# Altium PCB ESC_Mounting.PcbDoc
Units mil, origin at the board's own origin, x right, y up, seen from the top; angles counter-clockwise.
Board outline 1250 x 2900 mil, 2 copper layers (Top Layer, Bottom Layer); 4 components, 6 nets, 18 pads, 0 vias.
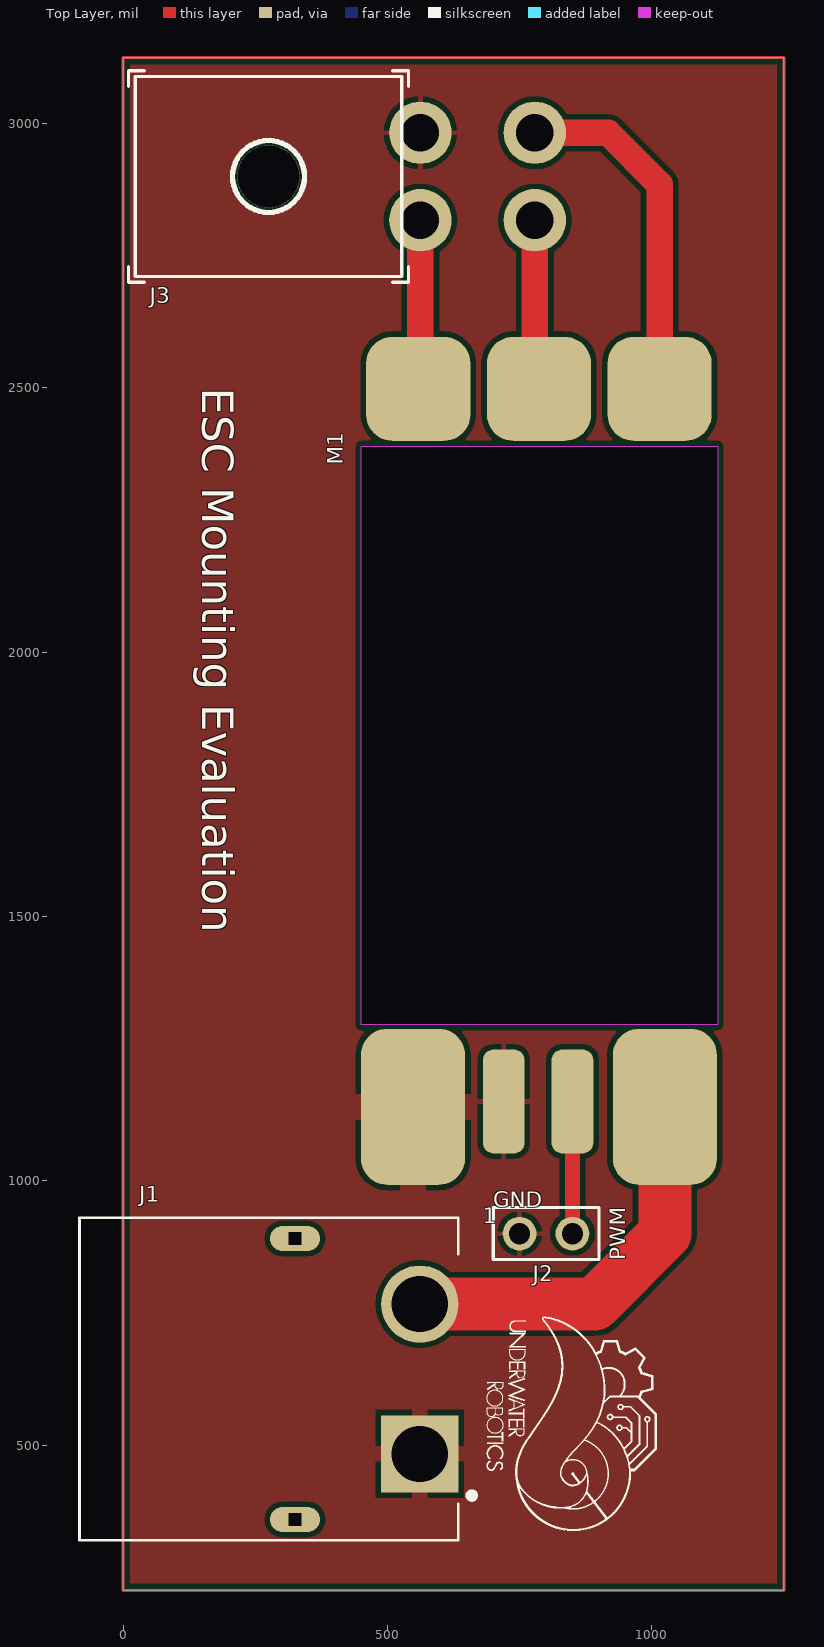
[diagram p0: Top Layer view]
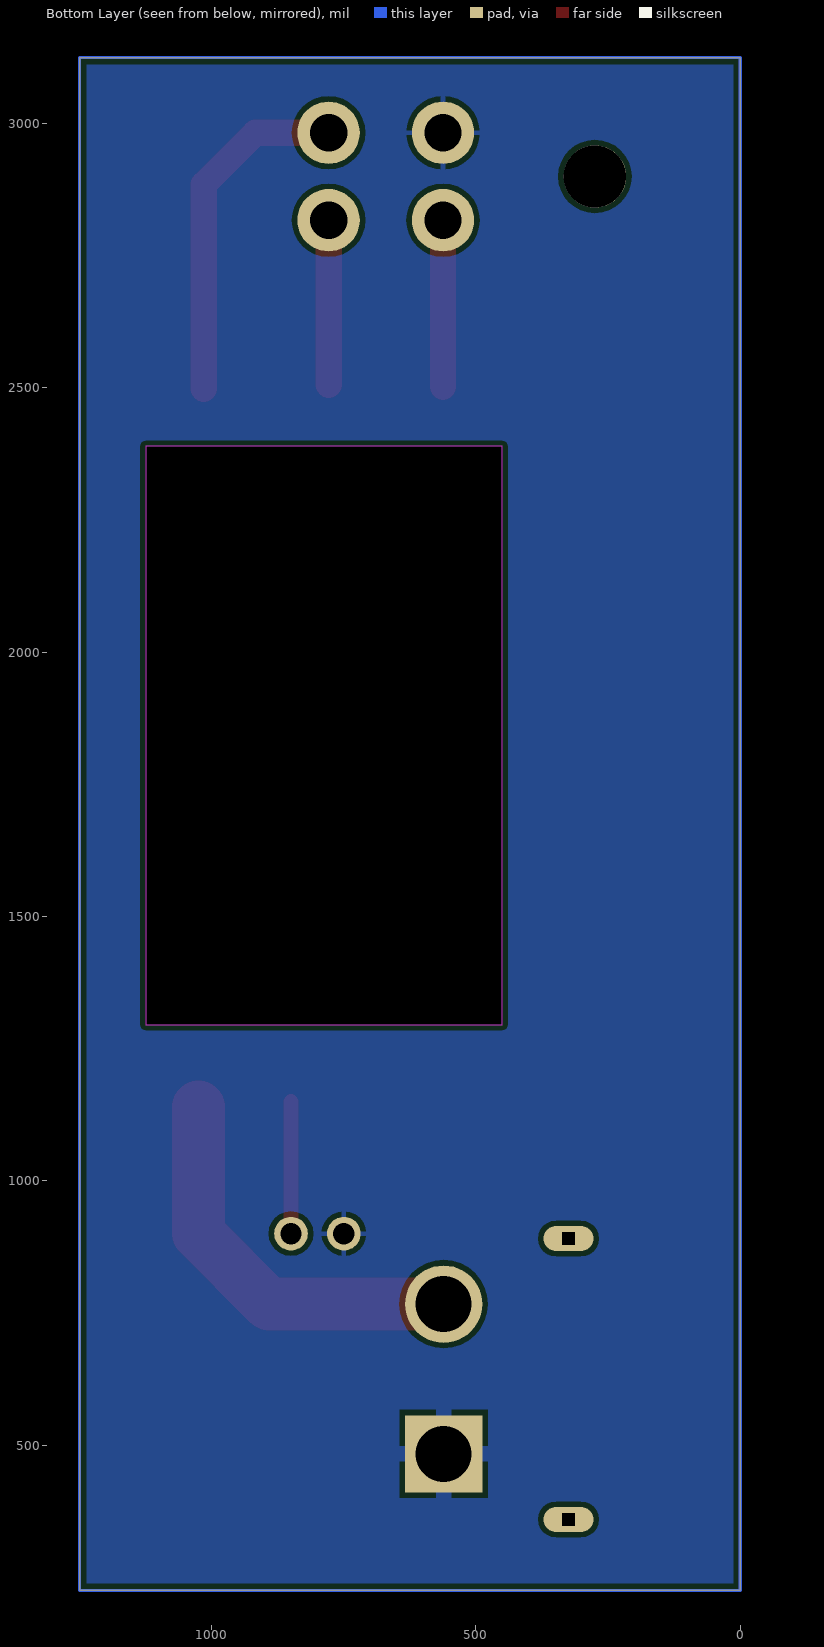
[diagram p1: Bottom Layer view, seen from below]
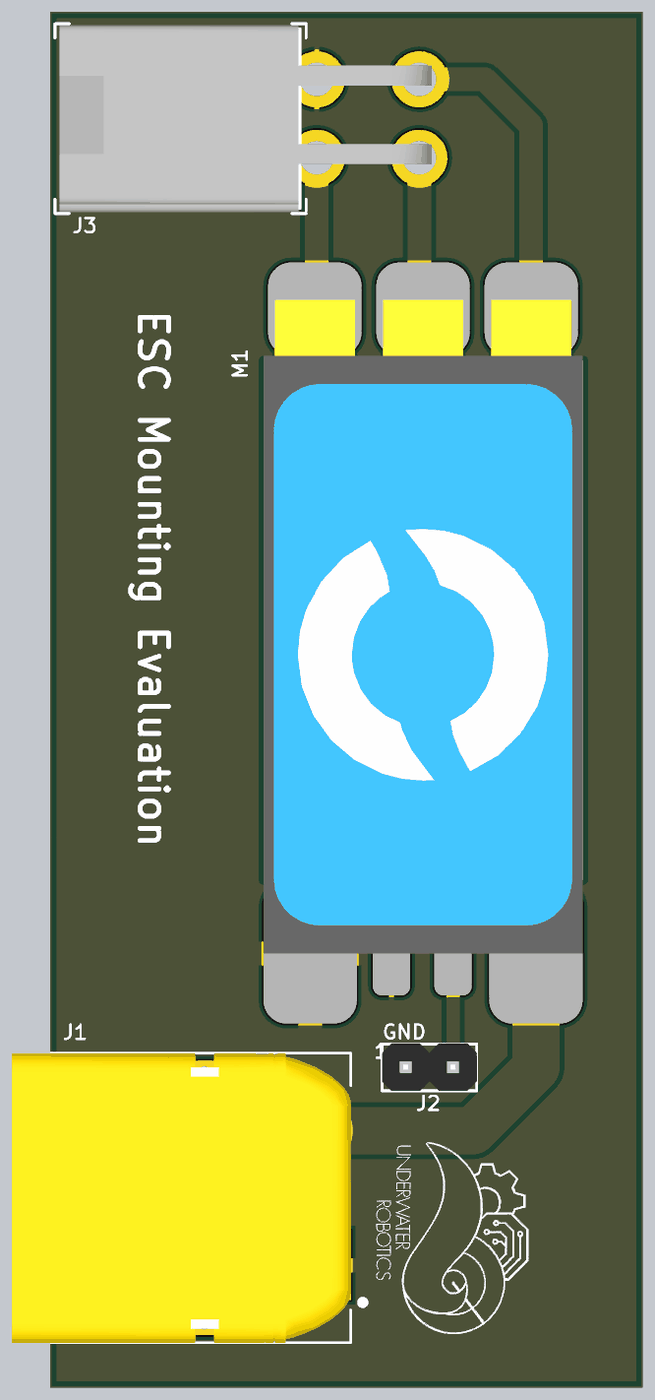
[diagram p2: 3D render of the assembled board from above, using the file's embedded part models]

## Layer stack, top to bottom
Top Solder: solder mask 0.4, Solder Resist, Dk 3.5
Top Layer: signal copper 1.4
Dielectric 1: dielectric 12.6, FR-4, Dk 4.8
Bottom Layer: signal copper 1.4
Bottom Solder: solder mask 0.4, Solder Resist, Dk 3.5

## Board outline
0,225 0,3125 1250,3125 1250,225

## Design rules (kind name [scope] priority, off if disabled: settings)
Clearance [All] p1: gap=10 ignorepadtopadclearanceinfootprint=FALSE except(0: Arc-Hole Track-Hole SMDPad-Hole THPad-Hole Via-Hole Fill-Hole Poly-Hole Region-Hole Text-Hole)
PolygonConnect [All] p1: connectstyle=Relief reliefconductorwidth=10 reliefentries=4 polygonreliefangle="90 Angle" airgapwidth=10
RoutingVias [All] p1: holewidth=28 width=50 viastyle="Through Hole" minholewidth=28 minwidth=50 maxholewidth=28 maxwidth=50
SolderMaskExpansion [All] p1: expansion=4 istentingtop=FALSE
Width [All] p1: maxlimit=10 minlimit=10 preferedwidth=10
30 further rules are at their usual default settings.

## Components (designator, comment, footprint, x,y, rotation, side; value= is the part's Value field where it differs from the comment)
J1 "XT60PW-M" XT60_PW_AMASS_M 325,625 r90 top
J2 "2 POS" HEADER_2PIN_2.54MM 750,900 r0 top
J3 "4 POS R/A" "CONN_MOLEX_MINIFIT JR_4 POS_R/A" 275,2900 r270 top
M1 "Basic ESC" BASIC_ESC 450,1140 r0 top

## Footprints (in the part's own frame and the unit in brackets; to place one, negate y for a bottom-side part, rotate by r counter-clockwise, add the part's x,y. Pads: shape width x height; smd on the part's side, far side on the other; paste and mask are expansions set on the pad)
BASIC_ESC [mm] "Blue Robotics Basic ESC Module"
  rrect50% 5x7.5 smd: 1(2.5,0) 4(14.6,0)
  rrect50% 2x5 smd: 2(6.858,0.254) 3(10.16,0.254)
  rrect50% 5x5 smd: 5(2.75,34.5) 6(8.55,34.5) 7(14.35,34.5)
  Keep-Out Layer board cut-out: 0,31.75 17.145,31.75 17.145,3.937 0,3.937
  body extent 0,0 17.1,35, height 3.35
"CONN_MOLEX_MINIFIT JR_4 POS_R/A" [mm] "Molex Minifit Jr 5569 4 Pos R/A"
  round 3 hole 1.8: 1(2.1,7.3) 2(-2.1,7.3) 3(2.1,12.8) 4(-2.1,12.8)
  round 3 hole 3 unplated mask+0: ""(0,0)
  silkscreen extent -5.08,-6.73 5.08,6.73, body extent -5,-6.48 5,13.46, height 11.4
HEADER_2PIN_2.54MM [mm]
  round 1.62 hole 1.02: 1(0,0) 2(2.54,0)
  silkscreen extent -1.27,-1.25 3.81,1.25, body extent -1.27,-1.25 3.81,1.29, height 8.39
XT60_PW_AMASS_M [mm] "XT60 60A RIGHT ANGLE MALE"
  rect 3.716x3.716 hole 2.7: 1(-3.6,-6)
  round 3.716 hole 2.7: 2(3.6,-6)
  oval 1.2x2.4 hole 0.6 square: S1(-6.75,0) S2(6.75,0)
  silkscreen extent -7.75,-8.65 7.75,10.35, body extent -7.75,-7.87 7.75,10.33, height 8.52

## Part data
J1: "XT60 60A Right Angle Male (30-45A MAX)", Package="Package Analog Devices", Availability=Unavailable, MF=AMASS, MP=XT60PW-M, Price=None, SnapEDA_Link=https://www.snapeda.com/parts/XT60PW-M%20/AMASS/view-part/3075559/?ref=snap
J2: library part HEADER_2PIN_2.54MM, "CONN HEADER VERT 2POS 2.54MM", Color=Natural, Current Per Pin=1A, Supplier Part Number 1=A121480-ND, ComponentLink1Description=Datasheet, ComponentLink1URL=https://www.molex.com/pdm_docs/sd/026013115_sd.pdf, Configuration=Vertical, Created By="Robert P", Number of Positions=2, Pitch=2.54mm, Supplier 1=Digi-Key, Supplier 2=Mouser, Supplier Part Number 2=571-5-146280-2
J3: library part "CONN_MOLEX_MINIFIT JR_4POS_R/A", "Molex Minifit Jr. 5569  / 4 Pos R/A Natural", Color=Natural, Current Per Pin=13A, Manufacturer=Molex, Supplier Part Number 1=WM13112-ND, ComponentLink1Description=Datasheet, ComponentLink1URL=https://www.molex.com/pdm_docs/sd/026013115_sd.pdf, Configuration="Right Angle", Created By="Flip B", Number of Positions=4, Pitch=4.2mm, Series="Minifit Jr 5569", Supplier 1=Digi-Key
M1: library part BASIC_ESC, "Blue Robotics Basic ESC  / 7-26V Power, 30A, 5V PWM Signal", Current="30A Max", Manufacturer="Blue Robotics", Manufacturer Part Number=BESC30-R3, PWM Voltage=5V, Voltage=7-26V, Created By="Flip B"

## Nets (pads, with @x,y where several pads share a name; then routed paths per layer and width w, separated by ;. In a path a pad name is that pad's centre, name@x,y a point inside that pad or via, vN(x,y) a via of type N, cw(c..) or ccw(c..) an arc to the next point about the centre after c; other vN are vias at no path point)
GND: J1.1 J2.1 J3.2 M1.1 M1.2
NetJ3_1: J3.1 M1.5 | length 320.8
  Top Layer w10: M1.5 M1.5@562.4,2502.4
  Top Layer w50: M1.5@562.4,2502.4 J3.1
NetJ3_3: J3.3 M1.6 | length 322.2
  Top Layer w10: M1.6@778.94,2505.94 M1.6
  Top Layer w50: M1.6@778.94,2505.94 J3.3
NetJ3_4: J3.4 M1.7 | length 663.2
  Top Layer w50: J3.4 917.32,2982.68 1014.96,2885.04 M1.7
PWM: J2.2 M1.3 | length 250
  Top Layer w28: J2.2 M1.3
VCC: J1.2 M1.4 | length 758.9
  Top Layer w100: J1.2 891.73,766.73 1024.8,899.8 M1.4
pads on no net: J1.S1 J1.S2 J3.

## Polygon pours and split planes (outlines as drawn)
GND on Top Layer "GND_L01_P000" (solid, pour order 0): 0,225 0,3125 1250,3125 1250,225
GND on Bottom Layer "GND_L02_P001" (solid, pour order 1): 0,225 0,3125 1250,3125 1250,225

## Other copper
Multi-Layer:
  the board outline again, w6

## Silkscreen, mask and mechanical layers (free items; w line width, h text height)
Top Overlay:
  drawing of 19 lines, arcs and shapes, not listed
  text "ESC Mounting Evaluation" at 150,2500 h60 r270
  text "GND" at 700,950 h30
  text "PWM" at 950,850 h30 r90

## Text inside footprints (layer, text, board x,y; h text height)
J2: Top Overlay "1" at 680,920 h30